# Altium PCB Y001_Artix7_USB3.0_D0.PcbDoc (part 2 of 2)
Units mil, origin at the board's own origin, x right, y up, seen from the top; angles counter-clockwise.
Board outline 4724.41 x 3149.61 mil, 8 copper layers (Top Layer, DGND, SIGNAL1, POWER, SIGNAL2, SIGNAL3, VCC3V3, Bottom Layer); 323 components, 271 nets, 1472 pads, 570 vias.
Unrouted connection lines stored in the file: 778.
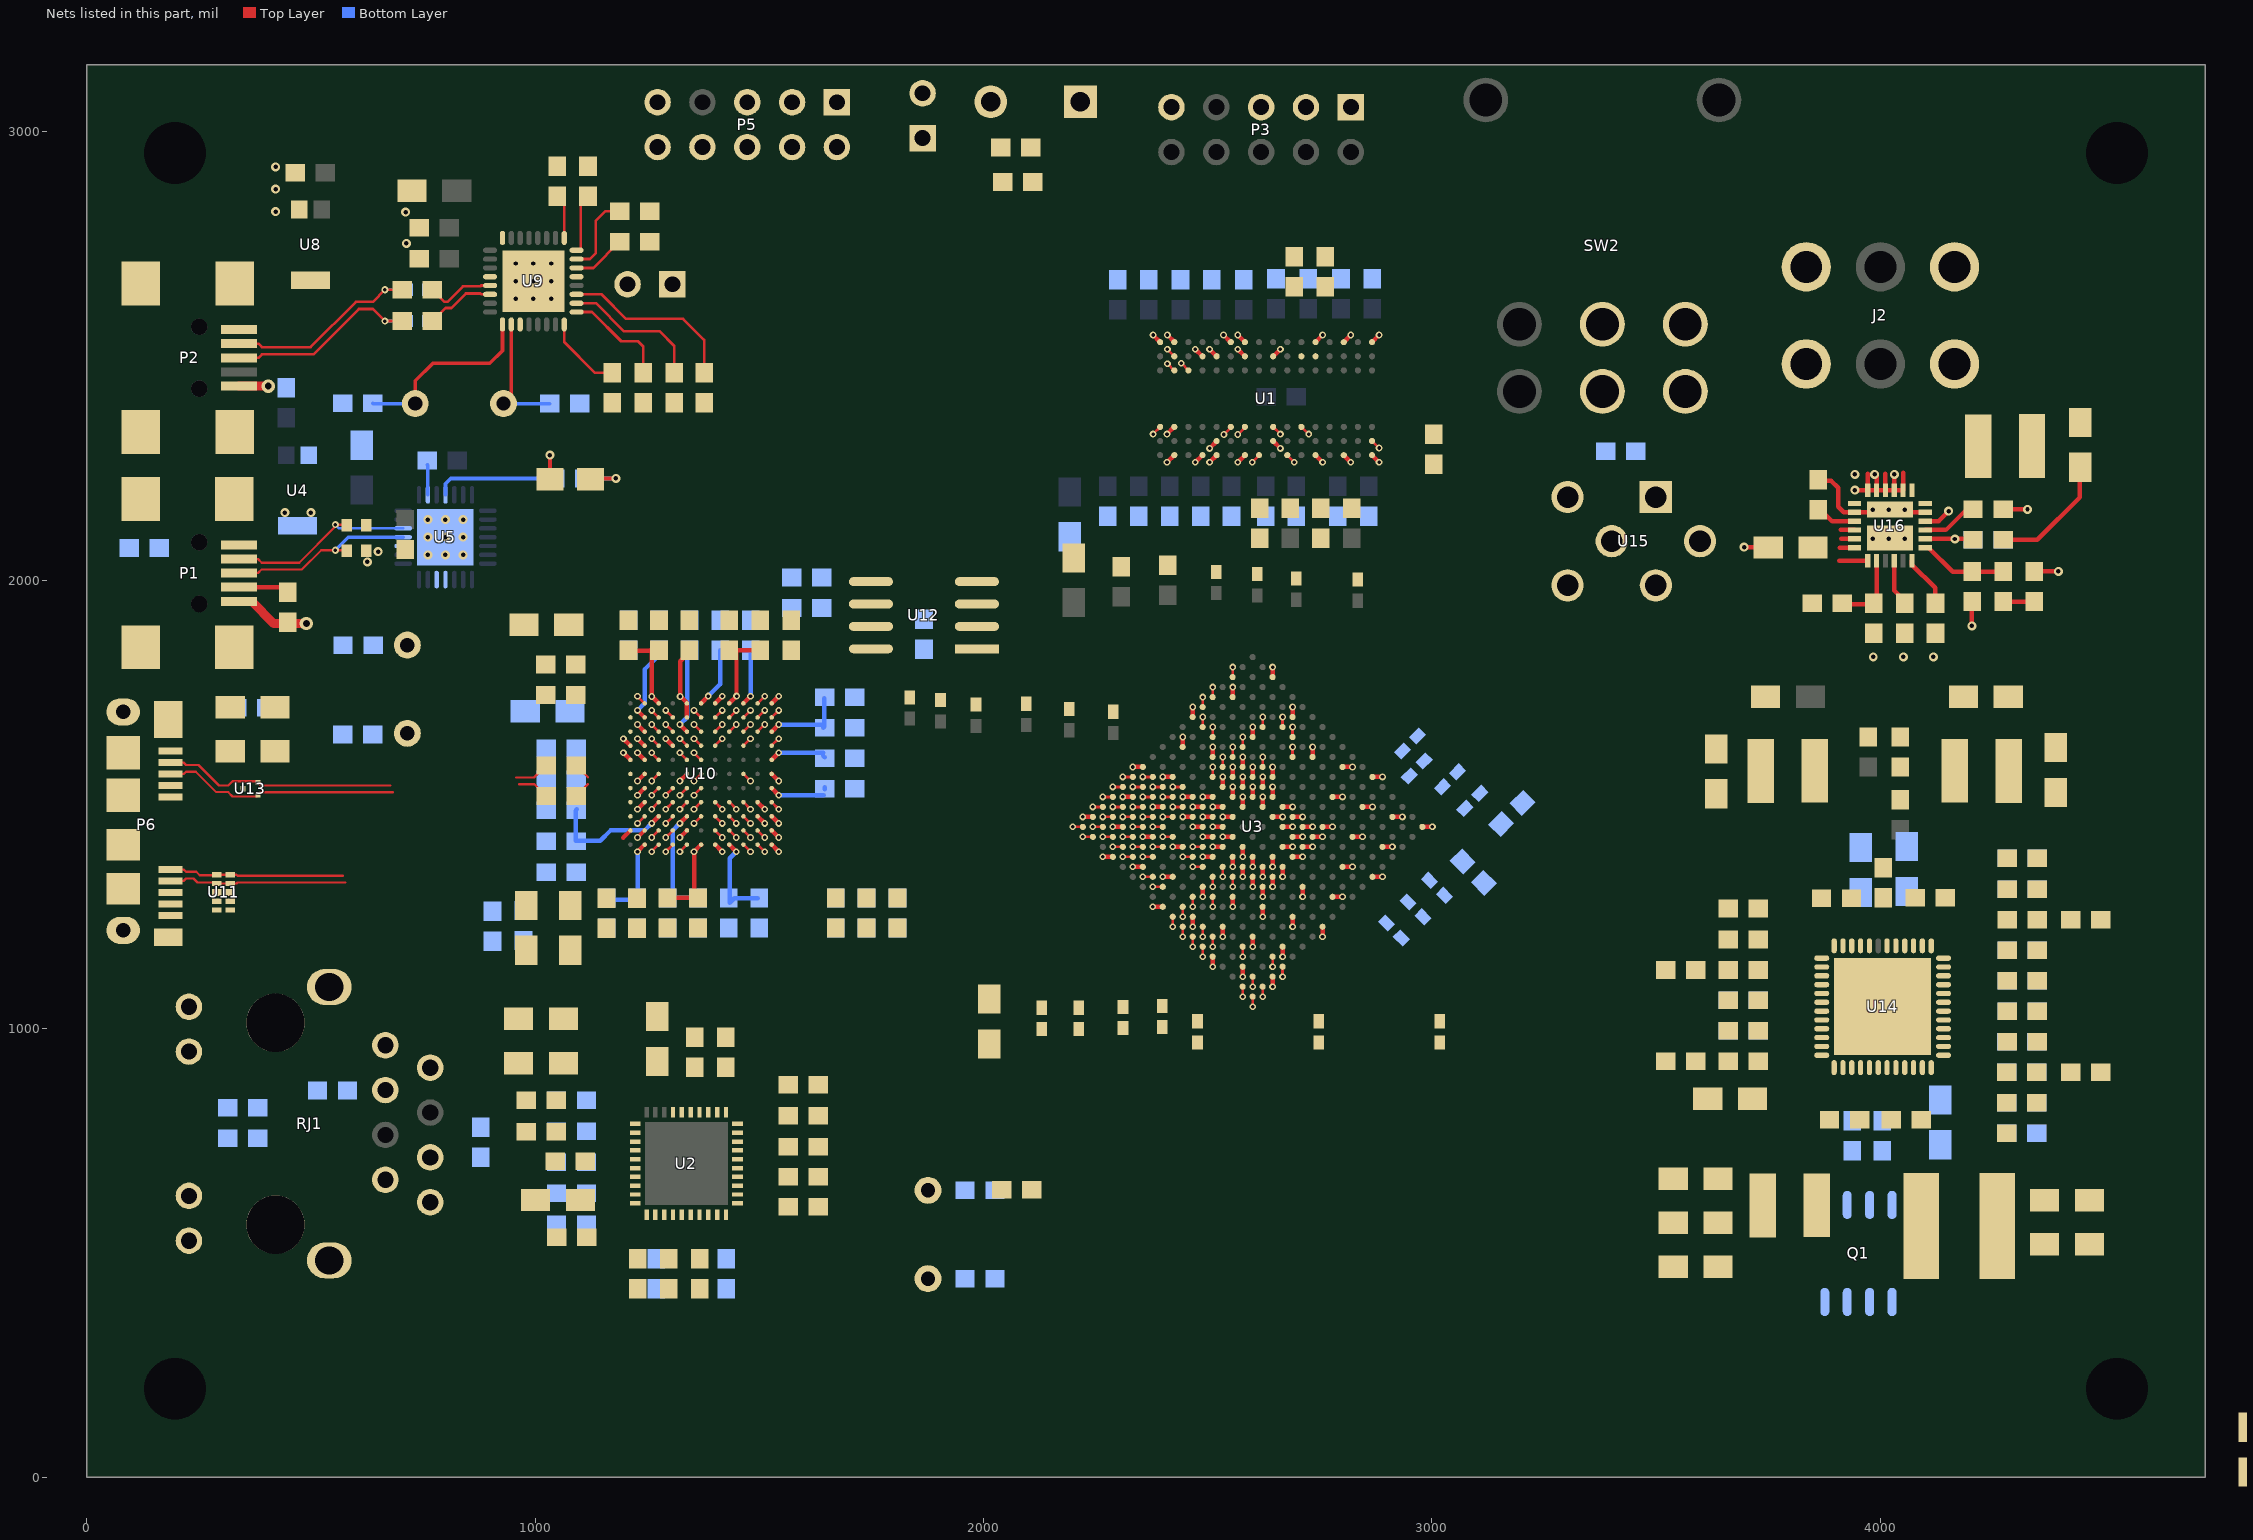
[diagram p6: the nets of this part, all layers, seen from the top]

## Via types
v1: diameter 15, hole 8, Top Layer to Bottom Layer, 506 vias
v2: diameter 20, hole 10, Top Layer to Bottom Layer, 58 vias
v3: diameter 16, hole 8, Top Layer to Bottom Layer, 4 vias
v4: diameter 30, hole 15, Top Layer to Bottom Layer, 2 vias

## Nets (pads, with @x,y where several pads share a name; then routed paths per layer and width w, separated by ;. In a path a pad name is that pad's centre, name@x,y a point inside that pad or via, vN(x,y) a via of type N, cw(c..) or ccw(c..) an arc to the next point about the centre after c; other vN are vias at no path point) (continued)
DDR3_DQ14: U1.B8 U3.A16 | length 44.9
  Top Layer w6: v1(2410,2515) U1.B8@2426,2499 ; U3.A16@2555.46,1784.07 v1(2555.46,1806.34)
DDR3_DQ15: U1.A3 U3.E15 | length 44.9
  Top Layer w6: v1(2378,2326) U1.A3@2394,2342 ; U3.E15@2622.27,1672.71 v1(2622.27,1694.98)
DDR3_DQS0_N: U1.G3 U3.B12 | length 44.9
  Top Layer w6: U3.B12@2488.64,1672.71 v1(2488.64,1694.98) ; v1(2567,2325) U1.G3@2583,2341
DDR3_DQS0_P: U1.F3 U3.C12 | length 44.9
  Top Layer w6: U3.C12@2510.92,1650.44 v1(2510.92,1672.71) ; v1(2536,2325) U1.F3@2552,2341
DDR3_DQS1_N: U1.B7 U3.A14 | length 44.9
  Top Layer w6: v1(2410,2483) U1.B7@2426,2467 ; U3.A14@2510.92,1739.52 v1(2510.92,1761.79)
DDR3_DQS1_P: U1.C7 U3.A13 | length 44.9
  Top Layer w6: v1(2441,2484) U1.C7@2457,2468 ; U3.A13@2488.64,1717.25 v1(2488.64,1739.52)
DDR3_ODT: U1.K1 U3.H15 | length 44.9
  Top Layer w6: U1.K1@2677,2279 v1(2693,2263) ; U3.H15@2689.08,1605.9 v1(2689.08,1628.17)
DDR3_RAS: U1.J3 U3.F16 | length 44.9
  Top Layer w6: U1.J3@2646,2342 v1(2662,2326) ; U3.F16@2666.81,1672.71 v1(2666.81,1694.98)
DDR3_RESET: R4.1 U1.T2 U3.G13 | length 44.9
  Top Layer w6: U3.G13@2622.27,1583.63 v1(2622.27,1605.9) ; U1.T2@2866,2311 v1(2882,2295)
DDR3_WE: U1.L3 U3.G16 | length 44.9
  Top Layer w6: U3.G16@2689.08,1650.44 v1(2689.08,1672.71) ; U1.L3@2709,2342 v1(2725,2326)
DQ0: U3.F5 U10.F10 | length 44.5
  Top Layer w6: v1(1354.25,1709.73) U10.F10@1370,1693.98 ; v1(2399.56,1427.73) U3.F5@2421.83,1427.73
DQ1: U3.C6 U10.F9 | length 44.5
  Top Layer w6: v1(1354.25,1678.24) U10.F9@1370,1662.49 ; v1(2355.02,1516.81) U3.C6@2377.29,1516.81
DQ2: U3.C5 U10.F7 | length 44.5
  Top Layer w6: v1(1354.25,1615.24) U10.F7@1370,1599.5 ; v1(2332.75,1494.54) U3.C5@2355.02,1494.54
DQ3: U3.B7 U10.G10 | length 44.5
  Top Layer w6: U10.G10@1401.5,1693.98 v1(1417.24,1709.73) ; v1(2355.02,1561.36) U3.B7@2377.29,1561.36
DQ4: U3.B6 U10.G9 | length 44.5
  Top Layer w6: U10.G9@1401.5,1662.49 v1(1417.24,1678.24) ; v1(2332.75,1539.08) U3.B6@2355.02,1539.08
DQ5: U3.A6 U10.F8 | length 44.5
  Top Layer w6: v1(1354.25,1646.74) U10.F8@1370,1630.99 ; v1(2310.48,1561.36) U3.A6@2332.75,1561.36
DQ6: U3.A5 U10.H10 | length 44.5
  Top Layer w6: U10.H10@1432.99,1693.98 v1(1448.74,1709.73) ; v1(2288.21,1539.08) U3.A5@2310.48,1539.08
DQ7: U3.D8 U10.H9 | length 44.5
  Top Layer w6: U10.H9@1432.99,1662.49 v1(1448.74,1678.24) ; v1(2421.83,1539.08) U3.D8@2444.1,1539.08
DQ8: U3.C7 U10.J10 | length 44.5
  Top Layer w6: U10.J10@1464.49,1693.98 v1(1480.24,1709.73) ; v1(2377.29,1539.08) U3.C7@2399.56,1539.08
DQ9: U3.E6 U10.J9 | length 44.5
  Top Layer w6: U10.J9@1464.49,1662.49 v1(1480.24,1678.24) ; v1(2399.56,1472.27) U3.E6@2421.83,1472.27
DQ10: U3.E5 U10.K11 | length 44.5
  Top Layer w6: U10.K11@1495.98,1725.48 v1(1511.73,1741.23) ; v1(2377.29,1450) U3.E5@2399.56,1450
DQ11: U3.E7 U10.L10 | length 44.5
  Top Layer w6: U10.L10@1527.48,1693.98 v1(1543.23,1709.73) ; v1(2421.83,1494.54) U3.E7@2444.1,1494.54
DQ12: U3.D7 U10.K10 | length 44.5
  Top Layer w6: U10.K10@1495.98,1693.98 v1(1511.73,1709.73) ; v1(2399.56,1516.81) U3.D7@2421.83,1516.81
DQ13: U3.C4 U10.K9 | length 44.5
  Top Layer w6: U10.K9@1495.98,1662.49 v1(1511.73,1678.24) ; v1(2310.48,1472.27) U3.C4@2332.75,1472.27
DQ14: U3.B4 U10.J8 | length 44.5
  Top Layer w6: U10.J8@1464.49,1630.99 v1(1480.24,1646.74) ; v1(2288.21,1494.54) U3.B4@2310.48,1494.54
DQ15: U3.A4 U10.G8 | length 44.5
  Top Layer w6: U10.G8@1401.5,1630.99 v1(1417.24,1646.74) ; v1(2265.93,1516.81) U3.A4@2288.2,1516.81
DQ16: U3.A3 U10.K2 | length 44.5
  Top Layer w6: U10.K2@1495.98,1442.02 v1(1511.73,1426.27) ; v1(2243.66,1494.54) U3.A3@2265.93,1494.54
DQ17: U3.B1 U10.J4 | length 44.5
  Top Layer w6: U10.J4@1464.49,1505.01 v1(1480.24,1489.26) ; v1(2221.39,1427.73) U3.B1@2243.66,1427.73
DQ18: U3.A1 U10.K1 | length 44.5
  Top Layer w6: U10.K1@1495.98,1410.52 v1(1511.73,1394.77) ; v1(2199.12,1450) U3.A1@2221.39,1450
DQ19: U3.B3 U10.J2 | length 44.5
  Top Layer w6: U10.J2@1464.49,1442.02 v1(1480.24,1426.27) ; v1(2265.93,1472.27) U3.B3@2288.2,1472.27
DQ20: U3.B2 U10.J3 | length 44.5
  Top Layer w6: U10.J3@1464.49,1473.51 v1(1480.24,1457.76) ; v1(2243.66,1450) U3.B2@2265.93,1450
DQ21: U3.D5 U10.J1 | length 44.5
  Top Layer w6: U10.J1@1464.49,1410.52 v1(1480.24,1394.77) ; v1(2355.02,1472.27) U3.D5@2377.29,1472.27
DQ22: U3.D4 U10.H2 | length 44.5
  Top Layer w6: U10.H2@1432.99,1442.02 v1(1448.74,1426.27) ; v1(2332.75,1450) U3.D4@2355.02,1450
DQ23: U3.E3 U10.H3 | length 44.5
  Top Layer w6: U10.H3@1432.99,1473.51 v1(1448.74,1457.76) ; v1(2332.75,1405.46) U3.E3@2355.02,1405.46
DQ24: U3.D3 U10.F4 | length 44.5
  Top Layer w6: v1(1354.25,1489.26) U10.F4@1370,1505.01 ; v1(2310.48,1427.73) U3.D3@2332.75,1427.73
DQ25: U3.F4 U10.G2 | length 44.5
  Top Layer w6: U10.G2@1401.5,1442.02 v1(1417.24,1426.27) ; v1(2377.29,1405.46) U3.F4@2399.56,1405.46
DQ26: U3.F3 U10.G3 | length 44.5
  Top Layer w6: U10.G3@1401.5,1473.51 v1(1417.24,1457.76) ; v1(2355.02,1383.19) U3.F3@2377.29,1383.19
DQ27: U3.E2 U10.F3 | length 44.5
  Top Layer w6: v1(1354.25,1457.76) U10.F3@1370,1473.51 ; v1(2310.48,1383.19) U3.E2@2332.75,1383.19
DQ28: U3.D2 U10.F5 | length 44.5
  Top Layer w6: v1(1354.25,1520.76) U10.F5@1370,1536.5 ; v1(2288.21,1405.46) U3.D2@2310.48,1405.46
DQ29: U3.H2 U10.E1 | length 44.5
  Top Layer w6: v1(1322.76,1394.77) U10.E1@1338.5,1410.52 ; v1(2377.29,1316.37) U3.H2@2399.56,1316.37
DQ30: U3.G2 U10.E5 | length 44.5
  Top Layer w6: v1(1322.76,1520.76) U10.E5@1338.5,1536.5 ; v1(2355.02,1338.64) U3.G2@2377.29,1338.64
DQ31: U3.C2 U10.E4 | length 44.5
  Top Layer w6: v1(1322.76,1489.26) U10.E4@1338.5,1505.01 ; v1(2265.93,1427.73) U3.C2@2288.2,1427.73
EARTH_ETH: RJ1.13 RJ1.14 RJ1.15 RJ1.16
EARTH_JTAG: P2.6 P2.7 P2.8 P2.9
EARTH_UART: P1.6 P1.7 P1.8 P1.9 R25.2
ETH3V3: C27.1 C28.1 C29.1 C30.1 C31.1 FB1.2 R6.1 R7.1 R8.1 R9.1 R16.2 R17.2 RJ1.3 RJ1.6 U2.18
ETH_COL: R12.2 U2.35 U3.U2 | length 22.3
  Top Layer w6: v1(2600,1093.66) U3.U2@2600,1115.93
ETH_CRS: R11.2 U2.33 U3.V2 | length 22.3
  Top Layer w6: v1(2622.27,1071.39) U3.V2@2622.27,1093.66
ETH_MDC: U2.25 U3.R3 | length 22.3
  Top Layer w6: v1(2577.73,1160.48) U3.R3@2577.73,1182.75
ETH_MDIO: R10.2 U2.24 U3.V4 | length 22.3
  Top Layer w6: v1(2666.81,1115.93) U3.V4@2666.81,1138.2
ETH_REF_CLK: R18.2
ETH_RSTN: R21.1 U2.23
ETH_RX_CLK: U2.31 U3.U4 | length 22.3
  Top Layer w6: v1(2644.54,1138.21) U3.U4@2644.54,1160.48
ETH_RX_DV: U2.32 U3.V1 | length 22.3
  Top Layer w6: v1(2600,1049.12) U3.V1@2600,1071.39
ETH_RXD0: R15.2 U2.36 U3.M2 | length 22.3
  Top Layer w6: v1(2488.64,1205.02) U3.M2@2488.64,1227.29
ETH_RXD1: R14.2 U2.37 U3.K5 | length 22.3
  Top Layer w6: v1(2510.92,1316.37) U3.K5@2510.92,1338.64
ETH_RXD2: U2.38 U3.L4 | length 22.3
  Top Layer w6: v1(2510.92,1271.83) U3.L4@2510.92,1294.1
ETH_RXD3: U2.39 U3.L6 | length 22.3
  Top Layer w6: v1(2555.46,1316.37) U3.L6@2555.46,1338.64
ETH_RXERR: R13.2 U2.34 U3.U1 | length 22.3
  Top Layer w6: v1(2577.73,1071.39) U3.U1@2577.73,1093.66
ETH_TX_CLK: U2.2 U3.N1 | length 22.3
  Top Layer w6: v1(2488.64,1160.48) U3.N1@2488.64,1182.75
ETH_TX_EN: U2.3 U3.N2 | length 22.3
  Top Layer w6: v1(2510.92,1182.75) U3.N2@2510.92,1205.02
ETH_TXD0: U2.4 U3.K6 | length 22.3
  Top Layer w6: v1(2533.19,1338.64) U3.K6@2533.19,1360.92
ETH_TXD1: U2.5 U3.L1 | length 22.3
  Top Layer w6: v1(2444.1,1205.02) U3.L1@2444.1,1227.29
ETH_TXD2: U2.6 U3.M1 | length 22.3
  Top Layer w6: v1(2466.37,1182.75) U3.M1@2466.37,1205.02
ETH_TXD3: U2.7 U3.K3 | length 22.3
  Top Layer w6: v1(2466.37,1271.83) U3.K3@2466.37,1294.1
FX3_GPIO50: U10.D1 | length 22.3
  Top Layer w6: v1(1291.26,1394.77) U10.D1@1307.01,1410.52
FX3_GPIO51: U10.D2 | length 22.3
  Top Layer w6: v1(1291.26,1426.27) U10.D2@1307.01,1442.02
FX3_GPIO52: U10.D3 | length 22.3
  Top Layer w6: v1(1291.26,1457.76) U10.D3@1307.01,1473.51
FX3_GPIO53: U10.D4 | length 22.3
  Top Layer w6: v1(1291.26,1489.26) U10.D4@1307.01,1505.01
FX3_GPIO54: U10.C1 | length 22.3
  Top Layer w6: v1(1259.76,1394.77) U10.C1@1275.51,1410.52
FX3_GPIO55: U10.C2 | length 22.3
  Top Layer w6: v1(1259.76,1426.27) U10.C2@1275.51,1442.02
FX3_GPIO56: U10.D5 | length 22.3
  Top Layer w6: v1(1291.26,1520.76) U10.D5@1307.01,1536.5
FX3_GPIO57: U10.C4 | length 22.3
  Top Layer w6: v1(1259.76,1489.26) U10.C4@1275.51,1505.01
GND: C2.2 C3.2 C4.2 C5.2 C6.2 C7.2 C8.2 C9.2 C10.2 C11.2 C12.2 C13.2 C14.2 C15.2 C16.2 C17.2 C18.2 C19.2 C20.2 C21.2 C22.2 C23.2 C24.2 C25.2 C26.2 C27.2 C28.2 C29.2 C30.2 C31.2 C32.2 C33.2 C34.2 C35.2 C36.2 C37.2 C38.2 C39.2 C40.2 C41.2 C42.2 C43.2 C44.2 C45.2 C46.2 C47.2 C48.2 C49.2 C50.2 C51.2 C52.2 C53.2 C54.2 C55.2 C56.2 C57.2 C58.2 C59.2 C60.2 C61.2 C62.2 C63.2 C64.2 C65.2 C66.2 C67.2 C68.2 C69.2 C70.2 C71.2 C72.2 C73.2 C74.2 C75.2 C76.2 C77.2 C78.2 C79.2 C80.2 C81.2 C82.2 C83.2 C84.2 C85.2 C86.2 C87.2 C88.2 C89.2 C90.2 C91.2 C92.2 C95.2 C96.2 C97.2 C98.2 C99.2 C100.2 C101.2 C102.2 C103.2 C104.2 C105.2 C106.2 C107.2 C108.2 C109.2 C110.2 C111.2 C112.2 C113.2 C114.2 C115.2 C116.2 C117.2 C118.2 C119.2 C120.2 C121.2 C122.2 C123.2 C124.2 C125.2 C126.2 C127.2 C128.2 C129.2 C130.2 C131.2 C132.2 C133.2 C134.2 C135.2 C136.2 C137.2 C138.2 C139.2 C140.2 C141.2 C142.2 C143.2 C144.2 C145.2 C146.2 C147.2 C148.2 C149.2 C150.2 C151.2 C152.2 C155.2 C156.1 C160.2 C161.2 C162.2 C163.2 C164.2 C165.2 C166.2 C167.2 C168.2 C169.2 C170.2 C174.1 C175.2 C176.2 C177.2 C178.2 C180.2 C182.2 C183.2 C184.1 C185.1 C186.1 C187.2 C189.2 C190.2 D1.2 D2.2 D3.2 D4.2 FB7.1 FB9.1 J2.3 J2.6 P1.5 P2.5 P4.1 P5.3 P5.5 P5.9 P6.5 P6.8 P7.1 Q1.1 Q1.3 R2.1 R4.2 R5.2 R11.1 R12.1 R13.1 R20.2 R23.2 R25.1 R42.1 R43.1 R44.1 R45.1 R46.1 R55.1 R57.1 R59.1 R61.1 R63.1 R65.2 R66.2 R67.2 R70.2 R71.2 R73.2 R75.2 R77.2 R79.2 R84.1 R85.1 R88.1 S1.2 TX1.2 U1.A9 U1.B1 U1.B3 U1.B9 U1.D1 U1.D8 U1.E1 U1.E2 U1.E8 U1.F9 U1.G1 U1.G8 U1.G9 U1.J2 U1.J8 U1.M1 U1.M9 U1.P1 U1.P9 U1.T1 U1.T9 U2.13 U2.17 U2.29 U2.40 U3.A2 U3.A12 U3.B5 U3.B15 U3.C8 U3.C18 U3.D1 U3.D11 U3.E4 U3.E14 U3.F7 U3.F9 U3.F11 U3.F17 U3.G8 U3.G10 U3.G12 U3.H3 U3.H7 U3.H11 U3.H13 U3.J6 U3.J8 U3.J12 U3.J16 U3.K7 U3.K11 U3.L2 U3.L8 U3.L12 U3.M5 U3.M7 U3.M9 U3.M11 U3.M15 U3.N8 U3.N10 U3.N12 U3.N18 U3.P1 U3.R4 U3.R14 U3.T7 U3.T17 U3.U10 U3.V3 U3.V13 U4.2 U5.3 U5.29 U8.2 U9.3 U9.28 U9.33 U10.A8 U10.B2 U10.B4 U10.B7 U10.B8 U10.B9 U10.D8 U10.E2 U10.E6 U10.G1 U10.G11 U10.K3 U10.K4 U10.L1 U10.L2 U10.L3 U10.L6 U10.L11 U11.3 U11.8 U12.1 U12.2 U12.3 U12.4 U12.7 U13.3 U14.2 U14.11 U14.13 U14.17 U14.18 U14.19 U14.30 U14.49 U15.5 U15.6 U15.7 U16.4 U16.8 U16.9 U16.10 U16.11 U16.12 U16.13 U16.25 | length 2792
  Top Layer w8: TX1.2@1033,2225 v2(1033,2279)
  Top Layer w10: v1(1196.77,1646.74) U10.A8@1212.52,1630.99 ; v1(1228.27,1426.27) U10.B2@1244.02,1442.02 ; v1(1228.27,1489.26) U10.B4@1244.02,1505.01 ; v1(1228.27,1615.24) U10.B7@1244.02,1599.5 ; v1(1228.27,1646.74) U10.B8@1244.02,1630.99 ; v1(1228.27,1678.24) U10.B9@1244.02,1662.49 ; v1(1291.26,1646.74) U10.D8@1307.01,1630.99 ; v1(1322.76,1426.27) U10.E2@1338.5,1442.02 ; v1(1322.76,1552.25) U10.E6@1338.5,1568 ; U10.G1@1401.5,1410.52 v1(1417.24,1394.77) ; U10.G11@1401.5,1725.48 v1(1417.24,1741.23) ; U10.K3@1495.98,1473.51 v1(1511.73,1457.76) ; U10.K4@1495.98,1505.01 v1(1511.73,1489.26) ; U10.L1@1527.48,1410.52 v1(1543.23,1394.77) ; U10.L2@1527.48,1442.02 v1(1543.23,1426.27) ; U10.L3@1527.48,1473.51 v1(1543.23,1457.76) ; U10.L6@1527.48,1568 v1(1543.23,1552.25) ; U10.L11@1527.48,1725.48 v1(1543.23,1741.23) ; v1(2221.39,1472.27) U3.A2@2243.66,1472.27 ; v1(2265.93,1383.19) U3.D1@2288.2,1383.19 ; v1(2310.48,1516.81) U3.B5@2332.75,1516.81 ; v1(2355.02,1427.73) U3.E4@2377.29,1427.73 ; v1(2378,2547) U1.A9@2394,2531 ; v1(2399.56,1338.64) U3.H3@2421.83,1338.64 ; v1(2399.56,1561.36) U3.C8@2421.83,1561.36 ; v1(2409,2263) U1.B1@2425,2279 ; v1(2409,2326) U1.B3@2425,2342 ; v1(2410,2547) U1.B9@2426,2531 ; v1(2444.1,1472.27) U3.F7@2466.37,1472.27 ; v1(2466.37,1227.29) U3.L2@2466.37,1249.56 ; U3.A12@2466.37,1694.98 v1(2466.37,1717.25) ; v1(2472,2263) U1.D1@2488,2279 ; v1(2472,2515) U1.D8@2488,2499 ; v1(2488.64,1383.19) U3.J6@2510.92,1383.19 ; v1(2488.64,1427.73) U3.H7@2510.92,1427.73 ; v1(2488.64,1472.27) U3.G8@2510.92,1472.27 ; v1(2488.64,1516.81) U3.F9@2510.92,1516.81 ; v1(2504,2263) U1.E1@2520,2279 ; v1(2504,2294) U1.E2@2520,2310 ; v1(2504,2515) U1.E8@2520,2499 ; v1(2510.92,1138.21) U3.P1@2510.92,1160.48 ; U3.D11@2510.92,1605.9 v1(2510.92,1628.17) ; v1(2533.19,1427.73) U3.J8@2555.46,1427.73 ; v1(2535,2547) U1.F9@2551,2531 ; v1(2555.46,1271.83) U3.M5@2555.46,1294.1 ; v1(2555.46,1360.92) U3.K7@2555.46,1383.19 ; U3.G10@2555.46,1516.81 v1(2555.46,1539.08) ; U3.F11@2555.46,1561.36 v1(2555.46,1583.63) ; U3.B15@2555.46,1739.52 v1(2555.46,1761.79) ; v1(2567,2263) U1.G1@2583,2279 ; v1(2567,2515) U1.G8@2583,2499 ; v1(2567,2547) U1.G9@2583,2531 ; U1.G8@2582.24,2500 U1.G8@2583,2500 ; v1(2600,1182.75) U3.R4@2600,1205.02 ; v1(2600,1316.37) U3.M7@2600,1338.64 ; v1(2600,1360.92) U3.L8@2600,1383.19 ; U3.H11@2600,1516.81 v1(2600,1539.08) ; U3.G12@2600,1561.36 v1(2600,1583.63) ; U3.E14@2600,1650.44 v1(2600,1672.71) ; v1(2644.54,1093.66) U3.V3@2644.54,1115.93 ; v1(2644.54,1316.37) U3.N8@2644.54,1338.64 ; v1(2644.54,1360.92) U3.M9@2644.54,1383.19 ; U3.K11@2644.54,1472.27 v1(2666.81,1472.27) ; U3.J12@2644.54,1516.81 v1(2644.54,1539.08) ; U3.H13@2644.54,1561.36 v1(2644.54,1583.63) ; U3.C18@2644.54,1784.07 v1(2644.54,1806.34) ; U1.J2@2646,2310 v1(2662,2294) ; U1.J8@2646,2499 v1(2662,2515) ; v1(2689.08,1227.29) U3.T7@2689.08,1249.56 ; U3.N10@2689.08,1383.19 v1(2711.36,1383.19) ; U3.M11@2689.08,1427.73 v1(2711.36,1427.73) ; U3.L12@2689.08,1472.27 v1(2711.36,1472.27) ; U3.F17@2689.08,1694.98 v1(2689.08,1717.25) ; U3.N12@2733.63,1427.73 v1(2755.9,1427.73) ; U3.J16@2733.63,1605.9 v1(2733.63,1628.17) ; U1.M1@2740,2279 v1(2756,2263) ; U1.M9@2740,2531 v1(2756,2547) ; U3.U10@2778.17,1294.1 v1(2800.44,1294.1) ; U3.M15@2778.17,1516.81 v1(2800.44,1516.81) ; U1.P1@2803,2279 v1(2819,2263) ; U1.P9@2803,2531 v1(2819,2547) ; U3.R14@2822.71,1427.73 v1(2844.98,1427.73) ; U1.T1@2866,2279 v1(2882,2263) ; U1.T9@2866,2531 v1(2882,2547) ; U3.V13@2867.25,1338.64 v1(2889.52,1338.64) ; U3.N18@2867.25,1561.36 v1(2889.52,1561.36) ; U3.T17@2911.8,1472.27 v1(2934.07,1472.27) ; v2(3696,2074) C183.2@3750.54,2074 ; v2@3938.26,2200.74 U16.12@3971.79,2200.74 ; 3971.79,2237.79 U16.12@3971.79,2200.74 ; v2@3991.47,2237.53 U16.11@3991.47,2200.74 ; 4011.16,2237.84 U16.10@4011.16,2200.74 ; v2@4030.84,2237.16 U16.9@4030.84,2200.74 ; 4050.53,2239.47 U16.8@4050.53,2200.74 U16.9@4030.84,2200.74 ; U16.4@4100,2132 4130,2132 v2(4152,2154) ; v2(4204,1898) C185.1@4204,1952.54 ; C182.2@4273.46,2158 v2(4328,2158) ; C186.1@4342.46,2020 v2(4397,2020) ; U16.12@3971.79,2200.74 U16.11@3991.47,2200.74 ; U16.11@3991.47,2200.74 U16.10@4011.16,2200.74 ; U16.10@4011.16,2200.74 U16.9@4030.84,2200.74
  Top Layer w20: P1.5@339.25,1953.01 367.99,1953.01 417.46,1903.54 v4(490,1903.54) ; P2.5@339.42,2433.01 v4(404.99,2433.01)
  other v2: 3984,1829 4051,1829 4118,1829 626,2041 760.63,2056.63 800,2056.63 839.37,2056.63 650,2064 3983,2093 4018.5,2093 4054,2093 760.63,2096 800,2096 839.37,2096 760.63,2135.37 800,2135.37 839.37,2135.37 3943,2201 3943,2236 3987,2236 4031,2236 956.63,2627.63 996,2627.63 1035.37,2627.63 956.63,2667 996,2667 1035.37,2667 956.63,2706.37 996,2706.37 1035.37,2706.37 713,2751 711,2821 421,2822 421,2872 421,2922
I2C_SCL: R37.2 U10.D9 U12.6 | length 22.3
  Top Layer w6: v1(1291.26,1678.24) U10.D9@1307.01,1662.49
I2C_SDA: R36.2 U10.D10 U12.5 | length 22.3
  Top Layer w6: v1(1291.26,1709.73) U10.D10@1307.01,1693.98
IF_INT: U3.K1 U10.L8 | length 44.5
  Top Layer w6: U10.L8@1527.48,1630.99 v1(1543.23,1646.74) ; v1(2421.83,1227.29) U3.K1@2421.83,1249.56
IF_PCLK: U3.K2 U10.J6 | length 44.5
  Top Layer w6: U10.J6@1464.49,1568 v1(1480.24,1552.25) ; v1(2444.1,1249.56) U3.K2@2444.1,1271.83
INPUT_GND: C181.2 U15.3
NetC1_2: C1.2 C2.1 C3.1 R1.1 R2.2 U1.H1 U1.M8 | length 22.6
  Top Layer w6: v1(2599,2263) U1.H1@2615,2279
NetC32_1: C32.1 R19.2 Y1.1
NetC33_1: C33.1 R18.1 U2.28 Y1.2
NetC34_1: C34.1 C35.1 C36.1 C37.1 U2.16 U2.19 U2.30
NetC45_1: C45.1 U9.1 Y2.1 | length 427
  Top Layer w8: Y2.1@732.58,2394 732.58,2444.57 772,2484 899,2484 927.1,2512.1 U9.1@927.1,2570.54
  Bottom Layer w8: C45.1@637.46,2395 638.46,2394 Y2.1@732.58,2394
NetC46_1: C46.1 U9.2 Y2.2 | length 286.8
  Top Layer w8: Y2.2@929.42,2394 946.79,2411.36 U9.2@946.79,2570.54
  Bottom Layer w8: Y2.2@929.42,2394 C46.1@1032.54,2394
NetC134_1: C134.1 U10.C6 Y3.1 | length 22.3
  Top Layer w6: v1(1259.76,1552.25) U10.C6@1275.51,1568
NetC152_1: C152.1 U10.C7 Y3.2 | length 22.3
  Top Layer w6: v1(1259.76,1615.24) U10.C7@1275.51,1599.5
NetC156_2: C156.2 FB7.2 P6.11 P6.12 P6.13 P6.14 P6.15 P6.16 P6.17 P6.18
NetC165_1: C165.1 U14.42
NetC167_1: C167.1 R50.1
NetC168_1: C168.1 R51.1
NetC169_1: C169.1 R52.1
NetC170_1: C170.1 R53.1
NetC171_1: C171.1 U14.32
NetC171_2: C171.2 L1.1 Q1.5 Q1.6 U14.33 U14.34
NetC172_1: C172.1 U14.28
NetC172_2: C172.2 L2.1 Q1.7 Q1.8 U14.26 U14.27
NetC173_1: C173.1 U14.1
NetC173_2: C173.2 L3.1 U14.3
NetC174_2: C174.2 L1.2 R68.2 R69.1
NetC175_1: C175.1 C176.1 L2.2 R72.2 R80.1
NetC177_1: C177.1 L3.2 R74.2 R81.1
NetC178_1: C178.1 L4.2 R76.2 R82.1
NetC179_1: C179.1 U14.12
NetC179_2: C179.2 L4.1 U14.10
NetC181_1: C181.1 SW2.3 SW2.6 U15.1
NetC182_1: C182.1 U16.3 | length 125.7
  Top Layer w10: U16.3@4099.74,2112.16 4146.16,2112.16 4193,2159 C182.1@4206,2159
NetC183_1: C183.1 R83.2 U15.8 U16.16 U16.17 U16.18 U16.19 | length 157.4
  Top Layer w10: 3907.74,2043.26 U16.19@3971.79,2043.26 ; 3909.79,2072.79 U16.18@3942.26,2072.79 ; 3911.16,2112.16 U16.16@3942.26,2112.16 ; 3912.53,2092.47 U16.17@3942.26,2092.47
NetC184_2: C184.2 U16.24 | length 118.7
  Top Layer w10: U16.24@4070.21,2043.26 4070.21,2034.79 4122,1983 C184.2@4122,1946
NetC185_2: C185.2 R86.2 U16.1 | length 196.5
  Top Layer w10: U16.1@4099.74,2072.79 4107.21,2072.79 4161,2019 R86.2@4274,2019
NetC186_2: C186.2 R86.1 | length 67.5
  Top Layer w10: R86.1@4274,1952.54 C186.2@4341.46,1952.54
NetC188_1: C188.1 U16.15 | length 94.2
  Top Layer w10: C188.1@3861,2163 3892.16,2131.84 U16.15@3942.26,2131.84
NetC188_2: C188.2 L5.1 U16.5 U16.6 U16.7 U16.14 U16.26 | length 286.5
  Top Layer w10: C188.2@3858,2222 3890,2222 3906,2206 3906,2164 3918.47,2151.53 U16.14@3942.26,2151.53 U16.26@4016.47,2151.53 ; U16.26@4025.47,2151.53 U16.5@4099.74,2151.53
  other v2: 3983,2157 4018.5,2157 4054,2157
NetFB6_2: FB6.2 P6.1
NetJ1_2: J1.2 P5.1
NetJ2_1: J2.1 J2.4 SW2.2 SW2.5
NetP1_1: P1.1 U4.1
  other v2: 442,2151 500,2151
NetP1_4: P1.4 R23.1 | length 114.6
  Top Layer w10: P1.4@339.25,1984.5 433.96,1984.5 R23.1@448,1970.46
NetP2_1: P2.1 U8.1
NetP4_2: P4.2 U9.13
NetP5_2: P5.2 U10.E8 | length 22.3
  Top Layer w6: v1(1322.76,1646.74) U10.E8@1338.5,1630.99
NetP5_4: P5.4 U10.F6 | length 22.3
  Top Layer w6: v1(1354.25,1552.25) U10.F6@1370,1568
NetP5_6: P5.6 U10.C10 | length 22.3
  Top Layer w6: v1(1259.76,1709.73) U10.C10@1275.51,1693.98
NetP5_8: P5.8 U10.E7 | length 22.3
  Top Layer w6: v1(1322.76,1615.24) U10.E7@1338.5,1599.5
NetP5_10: P5.10 U10.B11 | length 22.3
  Top Layer w6: v1(1228.27,1741.23) U10.B11@1244.02,1725.48
NetQ1_2: Q1.2 R71.1 U14.29
NetQ1_4: Q1.4 R70.1 U14.31
NetR5_1: R5.1 U1.L8
NetR16_1: R16.1 RJ1.10
NetR17_1: R17.1 RJ1.12
NetR19_1: R19.1 U2.27
NetR20_1: R20.1 U2.20
NetR22_2: R22.2 U5.9 | length 68
  Bottom Layer w8: R22.2@759.54,2258 760.63,2256.91 U5.9@760.63,2190.49
NetR24_1: R24.1 U5.11 | length 273.5
  Bottom Layer w8: U5.11@800,2190.49 800,2215 812,2227 R24.1@1044,2227
NetR24_2: R24.2 TX1.1 | length 127.4
  Top Layer w8: TX1.1@1123,2225 1125,2227 v2(1180,2227)
  Bottom Layer w8: R24.2@1110.46,2227 v2(1180,2227)
NetR28_1: R28.1
NetR28_2: R28.2 U9.8 | length 175
  Top Layer w6: U9.8@1064.9,2570.54 1064.9,2531.1 1133.54,2462.46 R28.2@1172,2462.46
NetR29_1: R29.1
NetR29_2: R29.2 U9.9 | length 239
  Top Layer w6: U9.9@1092.46,2598.1 1126.9,2598.1 1192,2533 1229,2533 1241,2521 R29.2@1241,2462.46
NetR30_1: R30.1 U9.15 | length 182.5
  Top Layer w6: U9.15@1092.46,2716.21 1122.21,2716.21 1135,2729 1135,2801 1157,2823 R30.1@1188.54,2823
NetR31_1: R31.1
NetR31_2: R31.2 U9.10 | length 317.3
  Top Layer w6: U9.10@1092.46,2617.79 1135.21,2617.79 1198,2555 1278,2555 1310,2523 R31.2@1310,2462.46
NetR32_1: R32.1 U9.14 | length 120.3
  Top Layer w6: U9.14@1092.46,2696.53 1130.06,2696.53 R32.1@1188.54,2755
NetR33_1: R33.1
NetR33_2: R33.2 U9.11 | length 400.1
  Top Layer w6: U9.11@1092.46,2637.47 1148.53,2637.47 1203,2583 1330,2583 1377,2536 R33.2@1377,2462.46
NetR34_1: R34.1 U9.17 | length 77.2
  Top Layer w6: U9.17@1064.9,2763.46 R34.1@1064.9,2840.64
NetR35_1: R35.1 U9.16 | length 136.7
  Top Layer w6: U9.16@1092.46,2735.9 1101.9,2735.9 1102,2736 1102,2840.54 R35.1@1118,2856.54
NetR42_2: R42.2 U10.B3 | length 22.3
  Top Layer w6: v1(1228.27,1457.76) U10.B3@1244.02,1473.51
NetR46_2: R46.2 U10.C8 | length 22.3
  Top Layer w6: v1(1259.76,1646.74) U10.C8@1275.51,1630.99
NetR50_2: R50.2 U14.39
NetR51_2: R51.2 U14.22
NetR52_2: R52.2 U14.46
NetR53_2: R53.2 U14.15
NetR54_1: R54.1 R55.2 U14.5 U14.37
NetR56_1: R56.1 R57.2 U14.38
NetR58_1: R58.1 R59.2 U14.48
NetR60_1: R60.1 R61.2 U14.47
NetR62_1: R62.1 R63.2 U14.14
NetR64_1: R64.1 R65.1 U14.43
NetR66_1: R66.1 U14.41
NetR67_1: R67.1 R68.1 U14.40
NetR72_1: R72.1 R73.1 U14.21
NetR74_1: R74.1 R75.1 U14.45
NetR76_1: R76.1 R77.1 U14.16
NetR78_1: R78.1 R79.1 U14.6
NetR83_1: R83.1 R84.2 U16.20 | length 178.3
  Top Layer w10: R83.1@3911,1949 3913.53,1946.47 3985,1946.47 3991.47,1946.47 U16.20@3991.47,2043.26
NetR85_2: R85.2 U16.22 | length 113
  Top Layer w10: U16.22@4030.84,2043.26 4030.84,1977.16 4052,1956 R85.2@4052,1939
NetR87_1: R87.1 R88.2 U16.2 | length 154.7
  Top Layer w10: U16.2@4099.74,2092.47 4204.53,2092.47 R87.1@4206,2091
  Bottom Layer w10: v2(4166,2092) 4211,2092 R88.2@4213,2090
NetRJ1_9: RJ1.9 U2.22
NetRJ1_11: RJ1.11 U2.21
NetTP1_1: U9.24
PG_ALL: U14.20
PMODE_0: R39.1 R43.2 U10.G4 | length 22.3
  Top Layer w6: U10.G4@1401.5,1505.01 v1(1417.24,1489.26)
PMODE_1: R40.1 R44.2 U10.H4 | length 22.3
  Top Layer w6: U10.H4@1432.99,1505.01 v1(1448.74,1489.26)
PMODE_2: R41.1 R45.2 U10.L4 | length 22.3
  Top Layer w6: U10.L4@1527.48,1505.01 v1(1543.23,1489.26)
RESET_USB: C135.1 R38.1 S1.1 U3.H6 U10.C5 | length 44.5
  Top Layer w6: v1(1259.76,1520.76) U10.C5@1275.51,1536.5 ; v1(2466.37,1405.46) U3.H6@2488.64,1405.46
RX_N: R9.2 RJ1.8 U2.11
RX_P: R8.2 RJ1.7 U2.12
TCK: P3.1 R30.2 U3.E10 | length 22.3
  Top Layer w6: U3.E10@2510.92,1561.36 v1(2510.92,1583.63)
TDI: P3.9 R35.2 U3.E11 | length 22.3
  Top Layer w6: U3.E11@2533.19,1583.63 v1(2533.19,1605.9)
TDO: P3.3 R34.2 U3.E13 | length 22.3
  Top Layer w6: U3.E13@2577.73,1628.17 v1(2577.73,1650.44)
TMS: P3.5 R32.2 U3.E12 | length 22.3
  Top Layer w6: U3.E12@2555.46,1605.9 v1(2555.46,1628.17)
TX_N: R7.2 RJ1.2 U2.14
TX_P: R6.2 RJ1.1 U2.15
USB_D_N: P6.2 U10.A10 U13.2 | length 519.3
  Top Layer w5: P6.2@186.66,1593.34 216,1593.34 221.3,1588.04 249.46,1588.04 295,1542.5 315.5,1542.5 325,1552 378.51,1552 U13.2@381.73,1548.78 388.51,1542 676.79,1542
USB_D_P: P6.3 U10.A9 U13.1 | length 525.1
  Top Layer w5: P6.3@186.66,1567.75 216,1567.75 221.3,1573.04 243.25,1573.04 288.79,1527.5 315.5,1527.5 325,1518 378.51,1518 U13.1@381.73,1521.22 387.51,1527 683,1527
USB_OTG_ID: P6.4 P7.2 U10.C9 | length 22.3
  Top Layer w6: v1(1259.76,1678.24) U10.C9@1275.51,1662.49
USB_PRECAPTX_N: C153.2 U10.A6 | length 37.5
  Top Layer w5: C153.2@1091.46,1587 1117.96,1560.5
USB_PRECAPTX_P: C154.2 U10.A5 | length 37.5
  Top Layer w5: C154.2@1091.46,1519 1117.96,1545.5
USB_RS232_RXD: U3.H5 U5.26 | length 22.3
  Top Layer w6: v1(2444.1,1383.19) U3.H5@2466.37,1383.19
USB_RS232_TXD: U3.J5 U5.25 | length 22.3
  Top Layer w6: v1(2466.37,1360.92) U3.J5@2488.64,1360.92
USB_SSRX_N: P6.9 U10.A4 U11.2 U11.9
USB_SSRX_P: P6.10 U10.A3 U11.1 U11.10
USB_SSTX_N: C153.1 P6.6 U11.5 U11.6 | length 480.7
  Top Layer w5: P6.6@186.66,1355.15 216,1355.15 221.3,1349.85 244.21,1349.85 252.07,1342 U11.6@290,1342 ; U11.6@289.84,1343.37 U11.5@320.16,1343.37 334,1343.37 336.34,1341.03 571.03,1341.03 ; 958,1560 980,1560 ; 992,1560 980,1560 ; C153.1@1024.54,1587 997.54,1560 980,1560
USB_SSTX_P: C154.1 P6.7 U11.4 U11.7 | length 497.9
  Top Layer w5: P6.7@186.66,1329.56 216,1329.56 221.3,1334.85 238,1334.85 246.85,1326 286,1326 287.16,1324.84 287.16,1321 U11.7@289.84,1323.69 U11.4@320.16,1323.69 334,1323.69 336.34,1326.03 577.24,1326.03 ; 964.21,1545 968,1545 ; 992,1545 968,1545 ; C154.1@1024.54,1519 998.54,1545 968,1545
USBA1_N: R26.1 U9.29 | length 155.2
  Top Layer w6: R26.1@770.46,2648 797.46,2621 804.37,2621 838.69,2655.31 878.16,2655.31 880,2657.16 U9.29@899.54,2657.16
USBA1_P: R27.1 U9.30 | length 153.3
  Top Layer w6: R27.1@772,2579 800,2607 813,2607 845.31,2639.31 878.16,2639.31 880,2637.47 U9.30@899.54,2637.47
USBA_N: D3.1 P2.2 R26.2 | length 471.4
  Top Layer w6: P2.2@339.42,2527.5 383,2527.5 390.75,2519.75 499,2519.75 600.25,2621 638,2621 v3(665,2648) R26.2@703.54,2648
  Bottom Layer w6: v3(665,2648) D3.1@716,2648
USBA_P: D4.1 P2.3 R27.2 | length 471.4
  Top Layer w6: P2.3@339.42,2496 383,2496 390.75,2503.75 505.63,2503.75 606.88,2605 638,2605 v3(665,2578) R27.2@703.54,2578
  Bottom Layer w6: v3(665,2578) D4.1@716,2578
USBB_N: D2.1 P1.2 U5.5 | length 436.3
  Top Layer w5: P1.2@339.25,2047.5 382,2047.5 390.25,2039.25 474.03,2039.25 554.46,2119.68 v3(554.46,2124)
  Top Layer w6: v3(554.46,2124) D2.1@580,2124
  Bottom Layer w6: v3(554.46,2124) 562.78,2115.69 U5.5@705.51,2115.69
USBB_P: D1.1 P1.3 U5.4 | length 423.9
  Top Layer w5: P1.3@339.25,2016 382,2016 390.25,2024.25 480.25,2024.25 523,2067 v3(554.46,2067)
  Top Layer w6: v3(554.46,2067) D1.1@579,2067
  Bottom Layer w8: v3(554.46,2067) 583.46,2096 U5.4@705.51,2096
VBUS: C118.1 FB6.1 J1.1 U10.E10 U10.E11 | length 164.5
  Top Layer w10: v1(1323.23,1740.75) v1@1323.23,1740.99 ; U10.E10@1338.5,1693.98 U10.E11@1338.5,1725.48 1338.5,1726.5 1324.01,1740.99 v1@1323.23,1740.99 ; C118.1@1346,1842 1323.23,1819.23 v1@1323.23,1740.99
VCC0V95: C95.1 C96.1 C97.1 C98.1 C99.1 C100.1 C101.1 C110.1 C111.1 C112.1 C113.1 C114.1 C115.1 C116.1 C117.1 R58.2 R80.2 U3.F8 U3.F10 U3.G7 U3.G9 U3.G11 U3.H8 U3.J7 U3.J11 U3.K8 U3.L7 U3.L11 U3.M8 U3.M10 U3.N7 U3.N9 U3.N11 | length 356.3
  Top Layer w10: v1(2466.37,1450) U3.G7@2488.64,1450 ; v1(2466.37,1494.54) U3.F8@2488.64,1494.54 ; v1(2510.92,1405.46) U3.J7@2533.19,1405.46 ; v1(2510.92,1450) U3.H8@2533.19,1450 ; v1(2510.92,1494.54) U3.G9@2533.19,1494.54 ; U3.F10@2533.19,1539.08 v1(2533.19,1561.36) ; v1(2577.73,1338.64) U3.L7@2577.73,1360.92 ; v1(2577.73,1383.19) U3.K8@2577.73,1405.46 ; U3.G11@2577.73,1539.08 v1(2577.73,1561.36) ; v1(2622.27,1294.1) U3.N7@2622.27,1316.37 ; v1(2622.27,1338.64) U3.M8@2622.27,1360.92 ; U3.J11@2622.27,1494.54 v1(2622.27,1516.81) ; v1(2666.81,1338.64) U3.N9@2666.81,1360.92 ; U3.M10@2666.81,1405.46 v1(2689.08,1405.46) ; U3.L11@2666.81,1450 v1(2689.08,1450) ; U3.N11@2711.36,1405.46 v1(2733.63,1405.46)
VCC1V2: C119.1 C120.1 C121.1 C122.1 C123.1 C124.1 C125.1 C126.1 C127.1 C128.1 C129.1 FB3.1 FB4.1 FB5.1 U10.B10 U10.C3 U10.E9 U10.F11 U10.H1 U10.J11 U10.L5 U10.L7 | length 1364.2
  Top Layer w10: v1(1228.27,1709.73) U10.B10@1244.02,1693.98 ; v1(1259.76,1457.76) U10.C3@1275.51,1473.51 ; v1(1322.76,1678.24) U10.E9@1338.5,1662.49 ; U10.F11@1370.48,1726 v1(1386.23,1741.75) ; U10.H1@1432.99,1410.52 v1(1448.74,1394.77) ; U10.J11@1464.49,1725.48 v1(1480.24,1741.23) ; U10.L5@1527.48,1536.5 v1(1543.23,1520.76) ; U10.L7@1527.48,1599.5 v1(1543.23,1615.24)
  Bottom Layer w10: C125.1@1093,1489 1090,1486 1090,1419 1145,1419 1168,1442 1244,1442 v1(1259.76,1457.76) ; v1(1228.27,1709.73) 1244,1725.46 1244,1801 C124.1@1276,1833 ; v1(1322.76,1678.24) 1339,1694.48 1339,1841 C121.1@1343,1845 ; v1(1386.23,1741.75) 1413,1768.52 C126.1@1413,1843.54 C126.1@1413,1844 ; v1(1448.74,1394.77) 1434,1380.03 1434,1281 1444,1291 C129.1@1496,1291 ; v1(1480.24,1741.23) C120.1@1480.24,1843.76 ; v1(1543.23,1520.76) C122.1@1644,1520.76 ; v1(1543.23,1615.24) C127.1@1642.76,1615.24 ; C127.1@1642.76,1608.24 C127.1@1646,1605 ; C122.1@1646,1534 C122.1@1646,1538
VCC1V2_AVDD: C136.1 C137.1 FB4.2 U10.A7 | length 22.3
  Top Layer w10: v1(1196.77,1615.24) U10.A7@1212.52,1599.5
VCC1V2_USBRX: C132.1 C133.1 FB3.2 U10.A2 | length 22.3
  Top Layer w10: 1196.77,1426.27 U10.A2@1212.52,1442.02
VCC1V2_USBTX: C138.1 C139.1 FB5.2 U10.B5 | length 22.3
  Top Layer w10: v1(1228.27,1520.76) U10.B5@1244.02,1536.5
VCC1V8: C102.1 C103.1 C104.1 C105.1 C106.1 C107.1 C108.1 C109.1 C140.1 C141.1 C142.1 C143.1 C144.1 C145.1 C146.1 C147.1 C148.1 C149.1 C150.1 C151.1 C155.1 FB2.1 R36.1 R37.1 R38.2 R39.2 R40.2 R41.2 R62.2 R81.2 U3.E8 U3.F12 U3.H12 U3.K12 U3.M12 U10.B1 U10.C11 U10.E3 U10.F1 U10.H11 U10.L9 U12.8 | length 1355.8
  Top Layer w10: C142.1@1206,1843 1264,1843 1260,1847 1260,1740.99 U10.C11@1275.51,1725.48 ; v1(1228.27,1394.77) U10.B1@1244.02,1410.52 ; C151.1@1287,1292 1351.5,1292 1354.25,1294.75 v1(1354.25,1394.77) U10.F1@1370,1410.52 ; v1(1322.76,1457.76) U10.E3@1338.5,1473.51 ; C145.1@1354.25,1281.75 C145.1@1358,1278 ; U10.H11@1432.99,1725.48 1449,1741.49 1449,1844 1505,1844 C147.1@1506,1845 ; U10.L9@1527.48,1662.49 v1(1543.23,1678.24) ; v1(2444.1,1516.81) U3.E8@2466.37,1516.81 ; U3.F12@2577.73,1583.63 v1(2577.73,1605.9) ; U3.H12@2622.27,1539.08 v1(2622.27,1561.36) ; U3.K12@2666.81,1494.54 v1(2689.08,1494.54) ; U3.M12@2711.36,1450 v1(2733.63,1450)
  Bottom Layer w10: C144.1@1148,1289 1150,1287 1228,1287 1228.27,1287.27 v1(1228.27,1394.77) ; C143.1@1296,1291.46 C149.1@1364,1291.46 1365.54,1291.46 C149.1@1368,1289 ; C143.1@1307,1288 1307,1442.01 v1(1322.76,1457.76) ; C149.1@1352,1293 C149.1@1354.25,1295.25 ; v1(1543.23,1678.24) C140.1@1642.76,1678.24 ; C140.1@1642.76,1671.24 1645,1673.47 C146.1@1645,1737
  other v1: 1260.23,1740.75 1449.23,1741.75
VCC1V8_CVDDQ: C130.1 C131.1 FB2.2 U10.B6 | length 22.3
  Top Layer w10: v1(1228.27,1552.25) U10.B6@1244.02,1568
VCC3V3: C23.1 C24.1 C25.1 C26.1 C47.1 C48.1 C49.1 C50.1 C51.1 C52.1 C53.1 C54.1 C55.1 C56.1 C57.1 C58.1 C59.1 C60.1 C74.1 C75.1 C76.1 C77.1 C78.1 C79.1 C80.1 C81.1 C82.1 C83.1 C84.1 C85.1 C86.1 C87.1 C88.1 C89.1 C90.1 C91.1 C92.1 C166.1 FB1.1 R10.1 R14.1 R15.1 R21.2 R69.2 U2.1 U2.26 U3.A7 U3.B10 U3.C3 U3.D6 U3.F2 U3.G5 U3.J1 U3.K4 U3.L17 U3.N3 U3.N13 U3.P6 U3.P16 U3.R9 U3.T2 U3.T12 U3.U5 U3.U15 U3.V8 U3.V18 U14.8 | length 445.4
  Top Layer w10: v1(2288.21,1450) U3.C3@2310.48,1450 ; v1(2332.75,1360.92) U3.F2@2355.02,1360.92 ; v1(2332.75,1583.63) U3.A7@2355.02,1583.63 ; v1(2377.29,1271.83) U3.J1@2399.56,1271.83 ; v1(2377.29,1494.54) U3.D6@2399.56,1494.54 ; v1(2421.83,1405.46) U3.G5@2444.1,1405.46 ; U3.B10@2444.1,1628.17 v1(2444.1,1650.44) ; v1(2488.64,1294.1) U3.K4@2488.64,1316.37 ; v1(2533.19,1205.02) U3.N3@2533.19,1227.29 ; v1(2577.73,1115.93) U3.T2@2577.73,1138.2 ; v1(2622.27,1249.56) U3.P6@2622.27,1271.83 ; v1(2666.81,1160.48) U3.U5@2666.81,1182.75 ; v1(2711.36,1294.1) U3.R9@2711.36,1316.37 ; v1(2755.9,1205.02) U3.V8@2755.9,1227.29 ; U3.N13@2755.9,1450 v1(2778.17,1450) ; U3.T12@2800.44,1360.92 v1(2822.71,1360.92) ; U3.L17@2800.44,1583.63 v1(2822.71,1583.63) ; U3.P16@2844.98,1494.54 v1(2867.25,1494.54) ; U3.U15@2889.52,1405.46 v1(2911.8,1405.46) ; U3.V18@2978.61,1450 v1(3000.88,1450)
VCC5V: C160.1 C161.1 C162.1 C163.1 C187.1 L5.2 R87.2 U14.4 U14.9 U14.23 U14.24 U14.25 U14.35 U14.36 | length 278.9
  Top Layer w10: R87.2@4273.46,2090 4350,2090 4445,2185 C187.1@4445,2253
VREG: C164.1 R56.2 R60.2 R64.2 U14.44
XADC1V8: C93.1 C94.1 C190.1 FB8.2 U3.H10 | length 22.3
  Top Layer w10: U3.H10@2577.73,1494.54 v1(2577.73,1516.81)
XADCGND: C93.2 C94.2 FB9.2 U3.H9 | length 22.3
  Top Layer w10: v1(2533.19,1472.27) U3.H9@2555.46,1472.27
pads on no net: "P1. " "P2. " "SW2. " J2.2 J2.5 P2.4 P3.2 P3.4 P3.6 P3.7 P3.8 P3.10 P5.7 RJ1.4 RJ1.5 SW2.1 SW2.4 U1.J1 U1.J9 U1.L1 U1.L9 U1.M7 U1.T7 U2.8 U2.9 U2.10 U2.41 U3.A8 U3.A9 U3.A10 U3.B8 U3.B9 U3.C9 U3.C10 U3.C11 U3.C15 U3.D9 U3.D10 U3.D13 U3.E9 U3.J9 U3.J10 U3.K9 U3.K10 U3.K17 U3.K18 U3.L3 U3.L5 U3.L9 U3.L10 U3.L13 U3.L14 U3.L15 U3.L16 U3.L18 U3.M3 U3.M4 U3.M6 U3.M13 U3.M14 U3.M16 U3.M17 U3.M18 U3.N4 U3.N5 U3.N6 U3.N14 U3.N15 U3.N16 U3.N17 U3.P2 U3.P3 U3.P4 U3.P5 U3.P7 U3.P8 U3.P9 U3.P10 U3.P11 U3.P12 U3.P13 U3.P14 U3.P15 U3.P17 U3.P18 U3.R1 U3.R2 U3.R5 U3.R6 U3.R7 U3.R8 U3.R10 U3.R11 U3.R12 U3.R13 U3.R15 U3.R16 U3.R17 U3.R18 U3.T1 U3.T3 U3.T4 U3.T5 U3.T6 U3.T8 U3.T9 U3.T10 U3.T11 U3.T13 U3.T14 U3.T15 U3.T16 U3.T18 U3.U3 U3.U6 U3.U7 U3.U8 U3.U9 U3.U11 U3.U12 U3.U13 U3.U14 U3.U16 U3.U17 U3.U18 U3.V5 U3.V6 U3.V7 U3.V9 U3.V10 U3.V11 U3.V12 U3.V14 U3.V15 U3.V16 U3.V17 U5.1 U5.2 U5.10 U5.12 U5.13 U5.14 U5.15 U5.16 U5.17 U5.18 U5.19 U5.20 U5.21 U5.22 U5.23 U5.24 U5.27 U5.28 U6.1 U6.2 U6.3 U6.4 U6.5 U6.6 U6.7 U6.8 U7.1 U7.2 U7.3 U7.4 U7.5 U7.6 U7.7 U7.8 U7.9 U7.10 U7.11 U7.12 U7.13 U7.14 U9.5 U9.6 U9.7 U9.12 U9.18 U9.19 U9.20 U9.21 U9.22 U9.23 U9.25 U9.26 U10.A1 U10.A11 U10.D6 U10.D7 U10.D11 U10.F2 U16.21 U16.23
copper on no net: | length 2160.3
  Top Layer w6: v1(1196.77,1394.77) 1212.52,1410.52 ; v1(1196.77,1741.23) 1212.52,1725.48 ; v1(1291.26,1552.25) 1307.01,1568 ; v1(1291.26,1615.24) 1307.01,1599.5 ; v1(1291.26,1741.23) 1307.01,1725.48 ; v1(1354.25,1426.27) 1370,1442.02 ; v1(2488.64,1249.56) 2488.64,1271.83 ; v1(2510.92,1227.29) 2510.92,1249.56 ; v1(2533.19,1115.93) 2533.19,1138.2 ; v1(2533.19,1160.48) 2533.19,1182.75 ; v1(2533.19,1249.56) 2533.19,1271.83 ; v1(2533.19,1294.1) 2533.19,1316.37 ; v1(2555.46,1093.66) 2555.46,1115.93 ; v1(2555.46,1138.21) 2555.46,1160.48 ; v1(2555.46,1182.75) 2555.46,1205.02 ; v1(2555.46,1227.29) 2555.46,1249.56 ; v1(2577.73,1205.02) 2577.73,1227.29 ; v1(2577.73,1249.56) 2577.73,1271.83 ; v1(2577.73,1294.1) 2577.73,1316.37 ; 2577.73,1717.25 v1(2577.73,1739.52) ; v1(2600,1138.21) 2600,1160.48 ; v1(2600,1227.29) 2600,1249.56 ; v1(2600,1271.83) 2600,1294.1 ; v1(2622.27,1115.93) 2622.27,1138.2 ; v1(2622.27,1160.48) 2622.27,1182.75 ; v1(2622.27,1205.02) 2622.27,1227.29 ; v1(2644.54,1182.75) 2644.54,1205.02 ; v1(2644.54,1227.29) 2644.54,1249.56 ; v1(2644.54,1271.83) 2644.54,1294.1 ; v1(2666.81,1205.02) 2666.81,1227.29 ; v1(2666.81,1249.56) 2666.81,1271.83 ; v1(2666.81,1294.1) 2666.81,1316.37 ; v1(2689.08,1138.21) 2689.08,1160.48 ; v1(2689.08,1182.75) 2689.08,1205.02 ; v1(2689.08,1271.83) 2689.08,1294.1 ; v1(2689.08,1316.37) 2689.08,1338.64 ; v1(2711.36,1160.48) 2711.36,1182.75 ; v1(2711.36,1205.02) 2711.36,1227.29 ; v1(2711.36,1249.56) 2711.36,1271.83 ; 2711.36,1360.92 v1(2733.63,1360.92) ; 2711.36,1494.54 v1(2733.63,1494.54) ; v1(2733.63,1182.75) 2733.63,1205.02 ; v1(2733.63,1227.29) 2733.63,1249.56 ; v1(2733.63,1271.83) 2733.63,1294.1 ; 2733.63,1338.64 v1(2755.9,1338.64) ; 2733.63,1383.19 v1(2755.9,1383.19) ; 2733.63,1472.27 v1(2755.9,1472.27) ; 2733.63,1516.81 v1(2755.9,1516.81) ; v1(2755.9,1249.56) 2755.9,1271.83 ; 2755.9,1316.37 v1(2778.17,1316.37) ; 2755.9,1360.92 v1(2778.17,1360.92) ; 2755.9,1405.46 v1(2778.17,1405.46) ; 2755.9,1494.54 v1(2778.17,1494.54) ; 2755.9,1539.08 v1(2778.17,1539.08) ; v1(2778.17,1227.29) 2778.17,1249.56 ; 2778.17,1338.64 v1(2800.44,1338.64) ; 2778.17,1383.19 v1(2800.44,1383.19) ; 2778.17,1427.73 v1(2800.44,1427.73) ; 2778.17,1472.27 v1(2800.44,1472.27) ; 2778.17,1561.36 v1(2800.44,1561.36) ; 2778.17,1605.9 v1(2800.44,1605.9) ; 2800.44,1271.83 v1(2822.71,1271.83) ; 2800.44,1316.37 v1(2822.71,1316.37) ; 2800.44,1405.46 v1(2822.71,1405.46) ; 2800.44,1450 v1(2822.71,1450) ; 2800.44,1494.54 v1(2822.71,1494.54) ; 2800.44,1539.08 v1(2822.71,1539.08) ; 2800.44,1628.17 v1(2822.71,1628.17) ; 2822.71,1294.1 v1(2844.98,1294.1) ; 2822.71,1338.64 v1(2844.98,1338.64) ; 2822.71,1383.19 v1(2844.98,1383.19) ; 2822.71,1472.27 v1(2844.98,1472.27) ; 2822.71,1516.81 v1(2844.98,1516.81) ; 2822.71,1561.36 v1(2844.98,1561.36) ; 2822.71,1605.9 v1(2844.98,1605.9) ; 2844.98,1316.37 v1(2867.25,1316.37) ; 2844.98,1360.92 v1(2867.25,1360.92) ; 2844.98,1405.46 v1(2867.25,1405.46) ; 2844.98,1450 v1(2867.25,1450) ; 2844.98,1539.08 v1(2867.25,1539.08) ; 2844.98,1583.63 v1(2867.25,1583.63) ; 2867.25,1383.19 v1(2889.52,1383.19) ; 2867.25,1427.73 v1(2889.52,1427.73) ; 2867.25,1472.27 v1(2889.52,1472.27) ; 2867.25,1516.81 v1(2889.52,1516.81) ; 2889.52,1360.92 v1(2911.8,1360.92) ; 2889.52,1450 v1(2911.79,1450) ; 2889.52,1494.54 v1(2911.8,1494.54) ; 2889.52,1539.08 v1(2911.79,1539.08) ; 2911.8,1383.19 v1(2934.07,1383.19) ; 2911.8,1427.73 v1(2934.07,1427.73) ; 2911.8,1516.81 v1(2934.07,1516.81) ; 2934.07,1405.46 v1(2956.34,1405.46) ; 2934.07,1450 v1(2956.34,1450) ; 2934.07,1494.54 v1(2956.34,1494.54) ; 2956.34,1427.73 v1(2978.61,1427.73) ; 2956.34,1472.27 v1(2978.61,1472.27)

## Polygon pours and split planes (outlines as drawn)
+3V3_USB_A on SIGNAL1 "SIGNAL1-No Net" (hatched 90Degree grid 8 track 10, pour order 1003): 934,2491 1025,2491 1084,2491 1155,2562 1156,2563 1156,2757 1156,2843 1100,2899 971,2899 853,2899 798,2844 798,2786 798,2580 887,2491 936,2491
NetJ2_1 on SIGNAL1 "SIGNAL1-No Net" (hatched 90Degree grid 8 track 10, pour order 1002): 3919,2694 3919,2432 3842,2355 3820,2333 3330,2333 3307,2356 3288,2375 3288,2436 3288,2725 3351,2788 3389,2788 3851,2788 3919,2720 3919,2684
GND on DGND (split plane): 4330.71,2755.91 4704.31,2755.91 4704.31,393.7 4330.71,393.7 4330.71,20.1 393.7,20.1 393.7,393.7 20.1,393.7 20.1,2755.91 393.7,2755.91 393.7,3129.51 4330.71,3129.51
no net on POWER (split plane): 4330.71,2755.91 4704.31,2755.91 4704.31,393.7 4330.71,393.7 4330.71,20.1 393.7,20.1 393.7,393.7 20.1,393.7 20.1,2755.91 393.7,2755.91 393.7,3129.51 4330.71,3129.51
VCC3V3 on VCC3V3 (split plane): 4330.71,2755.91 4704.31,2755.91 4704.31,393.7 4330.71,393.7 4330.71,20.1 393.7,20.1 393.7,393.7 20.1,393.7 20.1,2755.91 393.7,2755.91 393.7,3129.51 4330.71,3129.51

## Keep-outs
Keep-Out Layer:
  lines w5: 0,2755.91 393.7,2755.91 ; 0,2755.91 393.7,2755.91 ; 0,2755.91 393.7,2755.91 ; 0,2755.91 393.7,2755.91 ; 393.7,393.7 393.7,0 393.7,393.7 ; 393.7,393.7 0,393.7 393.7,393.7 ; 393.7,2755.91 393.7,3149.61 ; 393.7,2755.91 393.7,3149.61 ; 393.7,2755.91 393.7,3149.61 ; 393.7,2755.91 393.7,3149.61 ; 4330.71,0 4330.71,393.7 ; 4330.71,0 4330.71,393.7 ; 4330.71,0 4330.71,393.7 ; 4330.71,0 4330.71,393.7 ; 4330.71,393.7 4724.41,393.7 ; 4330.71,393.7 4724.41,393.7 ; 4330.71,393.7 4724.41,393.7 ; 4330.71,393.7 4724.41,393.7 ; 4330.71,2755.91 4724.41,2755.91 ; 4330.71,2755.91 4330.71,3149.61 ; 4330.71,2755.91 4330.71,3149.61 ; 4330.71,2755.91 4724.41,2755.91 ; 4330.71,2755.91 4724.41,2755.91 ; 4330.71,2755.91 4330.71,3149.61 ; 4330.71,2755.91 4330.71,3149.61 ; 4330.71,2755.91 4724.41,2755.91 ; 0,0 4724.41,0 4724.41,3149.61 0,3149.61 0,0

## Other copper
Top Layer:
  rectangle net +5V_USB_A: 517,2810 565,2843
  rectangle net +5V_USB_A: 512,2797 538,2842
  region net GND: 486,2842 460,2842 460,2797 486,2797
  region net GND: 481,2843 433,2843 433,2810 481,2810
  rectangle net +5V_USB_A: 520,2891 575,2925
  region net GND: 476,2925 421,2925 421,2891 476,2891
  rectangle net GND: 616,2036 630,2131
  rectangle net GND: 620,2055 651,2075
  rectangle net GND: 3928,2173 3957,2222
  rectangle net GND: 3928,2195 4056,2252
  rectangle net GND: 3965,1807 4142,1893
  region net NetP2_1: 300,2549 474,2549 555,2630 555,2690 540,2705 455,2705 440,2690 440,2633 397,2590 300,2590 290,2580 290,2559
  region net +3V3_USB_A: 865,2690 865,2814 885,2834 885,2886 866,2905 803,2905 785,2887 785,2697 797,2685 860,2685
  pour cut-out: 782,2894 800,2912 752,2912 765,2899 765,2827 771,2821 769,2819 769,2694 774,2689 783,2689 782,2690
  region net GND: 755,2905 763,2897 763,2815 767,2811 767,2696 756,2685 710,2685 700,2695 700,2820 680,2840 680,2895 690,2905
  region net +5V_USB_A: 509,2934 509,2796 520,2785 579,2785 595,2801 595,2935 580,2950 525,2950
  region net GND: 489,2934 489,2796 478,2785 419,2785 403,2801 403,2935 418,2950 473,2950
  pour cut-out: 846,2629 855,2620 824,2589 809,2589 809,2598 808,2599 809,2600 817,2600
  region net +5V_USB_A: 850.5,2624.5 868.5,2624.5 870,2623 870,2607 845,2582 845,2565 840,2560 820,2560 815,2565 815,2589
  region net NetP1_1: 299,2069 473,2069 520,2116 520,2155 510,2165 430,2165 420,2155 420,2110 405,2095 299,2095 294,2090 294,2074
  pour cut-out: 735,2046 735,2090 732,2093 635,2093 653,2111 733,2111 745,2099 745,2032 728,2015 683,2015 683,2021 693,2031 720,2031
  region net GND: 635,2093 732,2093 735,2090 735,2046 720,2031 620,2031 611,2040 611,2069
  region net NetC183_1: 3928,2118 3928,2034 3870,1976 3870,1929 3858,1917 3822,1917 3807,1932 3807,2095 3821,2109 3893,2109 3902,2118
  region net NetC188_2: 4065,2154 4071,2145 4116,2145 4125,2154 4125,2188 4151,2214 4250,2214 4261,2225 4261,2377 4249,2389 4140,2389 4065,2314
Bottom Layer:
  rectangle net +5V_USB_B: 429,2229 460,2371
  rectangle net +5V_USB_B: 408,2262 440,2296
  region net NetP1_1: 510,2165 520,2155 520,2105 510,2095 430,2095 420,2105 420,2155 430,2165
  region net +5V_USB_B: 452,2310 464,2298 464,2251 488,2227 659,2227 670,2216 670,2178 660,2168 586,2168 554,2200 450,2200 405,2245 405,2300 415,2310
DGND (plane layer: these items are gaps in the copper):
  rectangle: 0,2755.91 393.7,3149.61
  rectangle: 0,0 393.7,393.7
  rectangle: 4330.71,2755.91 4724.41,3149.61
  rectangle: 4330.71,0 4724.41,393.7
POWER (plane layer: these items are gaps in the copper):
  rectangle: 0,2755.91 393.7,3149.61
  rectangle: 4330.71,2755.91 4724.41,3149.61
  rectangle: 4330.71,0 4724.41,393.7
  rectangle: 0,0 393.7,393.7
VCC3V3 (plane layer: these items are gaps in the copper):
  rectangle: 0,2755.91 393.7,3149.61
  rectangle: 4330.71,2755.91 4724.41,3149.61
  rectangle: 4330.71,0 4724.41,393.7
  rectangle: 0,0 393.7,393.7

## Silkscreen, mask and mechanical layers (free items; w line width, h text height)
Top Overlay:
  circle w10: c196.85,2952.76 r137.8
  circle w10: c4527.56,2952.76 r137.8
  circle w10: c196.85,196.85 r137.8
  circle w10: c4527.56,196.85 r137.8
  lines w7.87: 383,310 4463,310 ; 1151,1585 1581,1585 ; 1385,1362 1385,1790 ; 2202,2413 3040,2413 ; 2393,1655 2898,1150 ; 2394,1240 2896,1742 ; 2628,2257 2628,2573 ; 3940,1414 3940,1404 3954,1390 3976,1390 ; 3944,1910 3793,1910 3793,1800 4102,1800 4153,1851
  lines w10: 0,2755.91 393.7,2755.91 393.7,3149.61 ; 4330.71,0 4330.71,393.7 4724.41,393.7 ; 4330.71,3149.61 4330.71,2755.91 4724.41,2755.91
Bottom Overlay:
  circle w10: c4527.56,2952.76 r137.8
  circle w10: c4527.56,196.85 r137.8
  circle w10: c196.85,196.85 r137.8
  circle w10: c196.85,2952.76 r137.8
  lines w10: 0,2755.91 393.7,2755.91 393.7,3149.61 ; 4330.71,0 4330.71,393.7 4724.41,393.7 ; 4330.71,3149.61 4330.71,2755.91 4724.41,2755.91
Mechanical 1:
  the board outline again, w20

## Dimensions
0,3149.61 to 4724.41,3149.61 on Mechanical 1
4527.56,2952.76 to 196.85,2952.76 on Mechanical 1
0,3149.61 to 0,0 on Mechanical 1
196.85,196.85 to 196.85,2952.76 on Mechanical 1

## Text inside footprints (layer, text, board x,y; h text height)
J1: Top Overlay "2" at 1804,3076 h30 r90; Top Overlay "1" at 1804,2976 h30 r90
J2: Top Overlay "1" at 3760,2661.64 h35 r90; Top Overlay "3" at 4280,2654 h35 r90; Top Overlay "4" at 3760,2456.64 h35 r90; Top Overlay "6" at 4280,2464 h35 r90; Mechanical 32 "5" at 4000,2462.36 h50 r90; Mechanical 32 "2" at 4000,2678.9 h50 r90; Mechanical 32 "1" at 3834.65,2678.9 h50 r90; Mechanical 32 "4" at 3834.65,2462.36 h50 r90; Mechanical 32 "6" at 4165.35,2462.36 h50 r90; Mechanical 32 "3" at 4165.35,2678.9 h50 r90
P1: Top Overlay "5" at 382.58,1904.02 h35; Top Overlay "1" at 373.86,2096.4 h35
P2: Top Overlay "1" at 374.03,2576.4 h35; Top Overlay "5" at 382.74,2384.02 h35
P3: Top Overlay "2" at 2919,2975 h50 r180; Top Overlay "1" at 2899,3075 h50 r180; Top Overlay "9" at 2359,3075 h50 r180; Top Overlay "10" at 2359,2975 h50 r180
P4: Top Overlay "1" at 1316,2600 h25 r180; Top Overlay "2" at 1216,2600 h25 r180
P5: Top Overlay "2" at 1773,2986 h50 r180; Top Overlay "1" at 1753,3086 h50 r180; Top Overlay "9" at 1213,3086 h50 r180; Top Overlay "10" at 1213,2986 h50 r180
P7: Top Overlay "1" at 5002,537 h25 r90; Top Overlay "2" at 5002,637 h25 r90
SW2: Top Overlay "3" at 3663.32,2576.56 h35 r90; Top Overlay "6" at 3628.32,2341.56 h35 r90; Top Overlay "1" at 3120,2566 h35 r90; Top Overlay "4" at 3120,2395.67 h35 r90
U1: Top Overlay "T" at 2861.66,2204.2 h35; Top Overlay "R" at 2829.41,2204.2 h35; Top Overlay "P" at 2796.62,2204.2 h35; Top Overlay "N" at 2763.14,2204.2 h35; Top Overlay "M" at 2726.02,2204.2 h35; Top Overlay "L" at 2699.18,2204.2 h35; Top Overlay "K" at 2664.69,2204.2 h35; Top Overlay "J" at 2634.48,2203.21 h35; Top Overlay "H" at 2601.69,2204.2 h35; Top Overlay "G" at 2570.2,2204.2 h35; Top Overlay "F" at 2540.7,2204.2 h35; Top Overlay "E" at 2510.2,2204.2 h35; Top Overlay "D" at 2479.71,2204.2 h35; Top Overlay "C" at 2445.21,2204.2 h35; Top Overlay "B" at 2411.72,2204.2 h35; Top Overlay "A" at 2378,2205 h35; Top Overlay "1" at 2323,2249 h35; Top Overlay "2" at 2320,2297 h35; Top Overlay "3" at 2320,2343 h35; Top Overlay "7" at 2320,2440 h35; Top Overlay "8" at 2320,2485 h35; Top Overlay "9" at 2321,2530 h35
U10: Top Overlay "11" at 1165.39,1733.35 h25 r90; Top Overlay "10" at 1165.39,1686.11 h25 r90; Top Overlay "9" at 1165.39,1654.61 h25 r90; Top Overlay "8" at 1165.39,1623.12 h25 r90; Top Overlay "7" at 1165.39,1591.62 h25 r90; Top Overlay "6" at 1165.39,1560.13 h25 r90; Top Overlay "5" at 1165.39,1528.63 h25 r90; Top Overlay "4" at 1165.39,1497.13 h25 r90; Top Overlay "3" at 1165.39,1465.64 h25 r90; Top Overlay "2" at 1165.39,1434.14 h25 r90; Top Overlay "1" at 1165.39,1402.65 h25 r90; Top Overlay "J" at 1472.36,1344.19 h25 r90; Top Overlay "L" at 1535.35,1344.19 h25 r90; Top Overlay "K" at 1503.86,1344.19 h25 r90; Top Overlay "H" at 1440.87,1344.19 h25 r90; Top Overlay "G" at 1409.37,1344.19 h25 r90; Top Overlay "F" at 1377.87,1344.19 h25 r90; Top Overlay "E" at 1346.38,1344.19 h25 r90; Top Overlay "D" at 1314.88,1344.19 h25 r90; Top Overlay "C" at 1283.39,1344.19 h25 r90; Top Overlay "B" at 1251.89,1344.19 h25 r90; Top Overlay "A" at 1220.39,1339.65 h25 r90
U15: Top Overlay "1" at 3520,2313 h35 r90; Top Overlay "3" at 3315,2313 h35 r90; Top Overlay "5" at 3313,1837 h35 r90; Top Overlay "8" at 3520,1833 h35 r90